# Altium PCB RPlan_LB2.PcbDoc
Units mm, origin at the board's own origin, x right, y up, seen from the top; angles counter-clockwise.
Board outline 38.2 x 43.28 mm, 2 copper layers (Top Layer, Bottom Layer); 36 components, 101 nets, 271 pads, 28 vias.
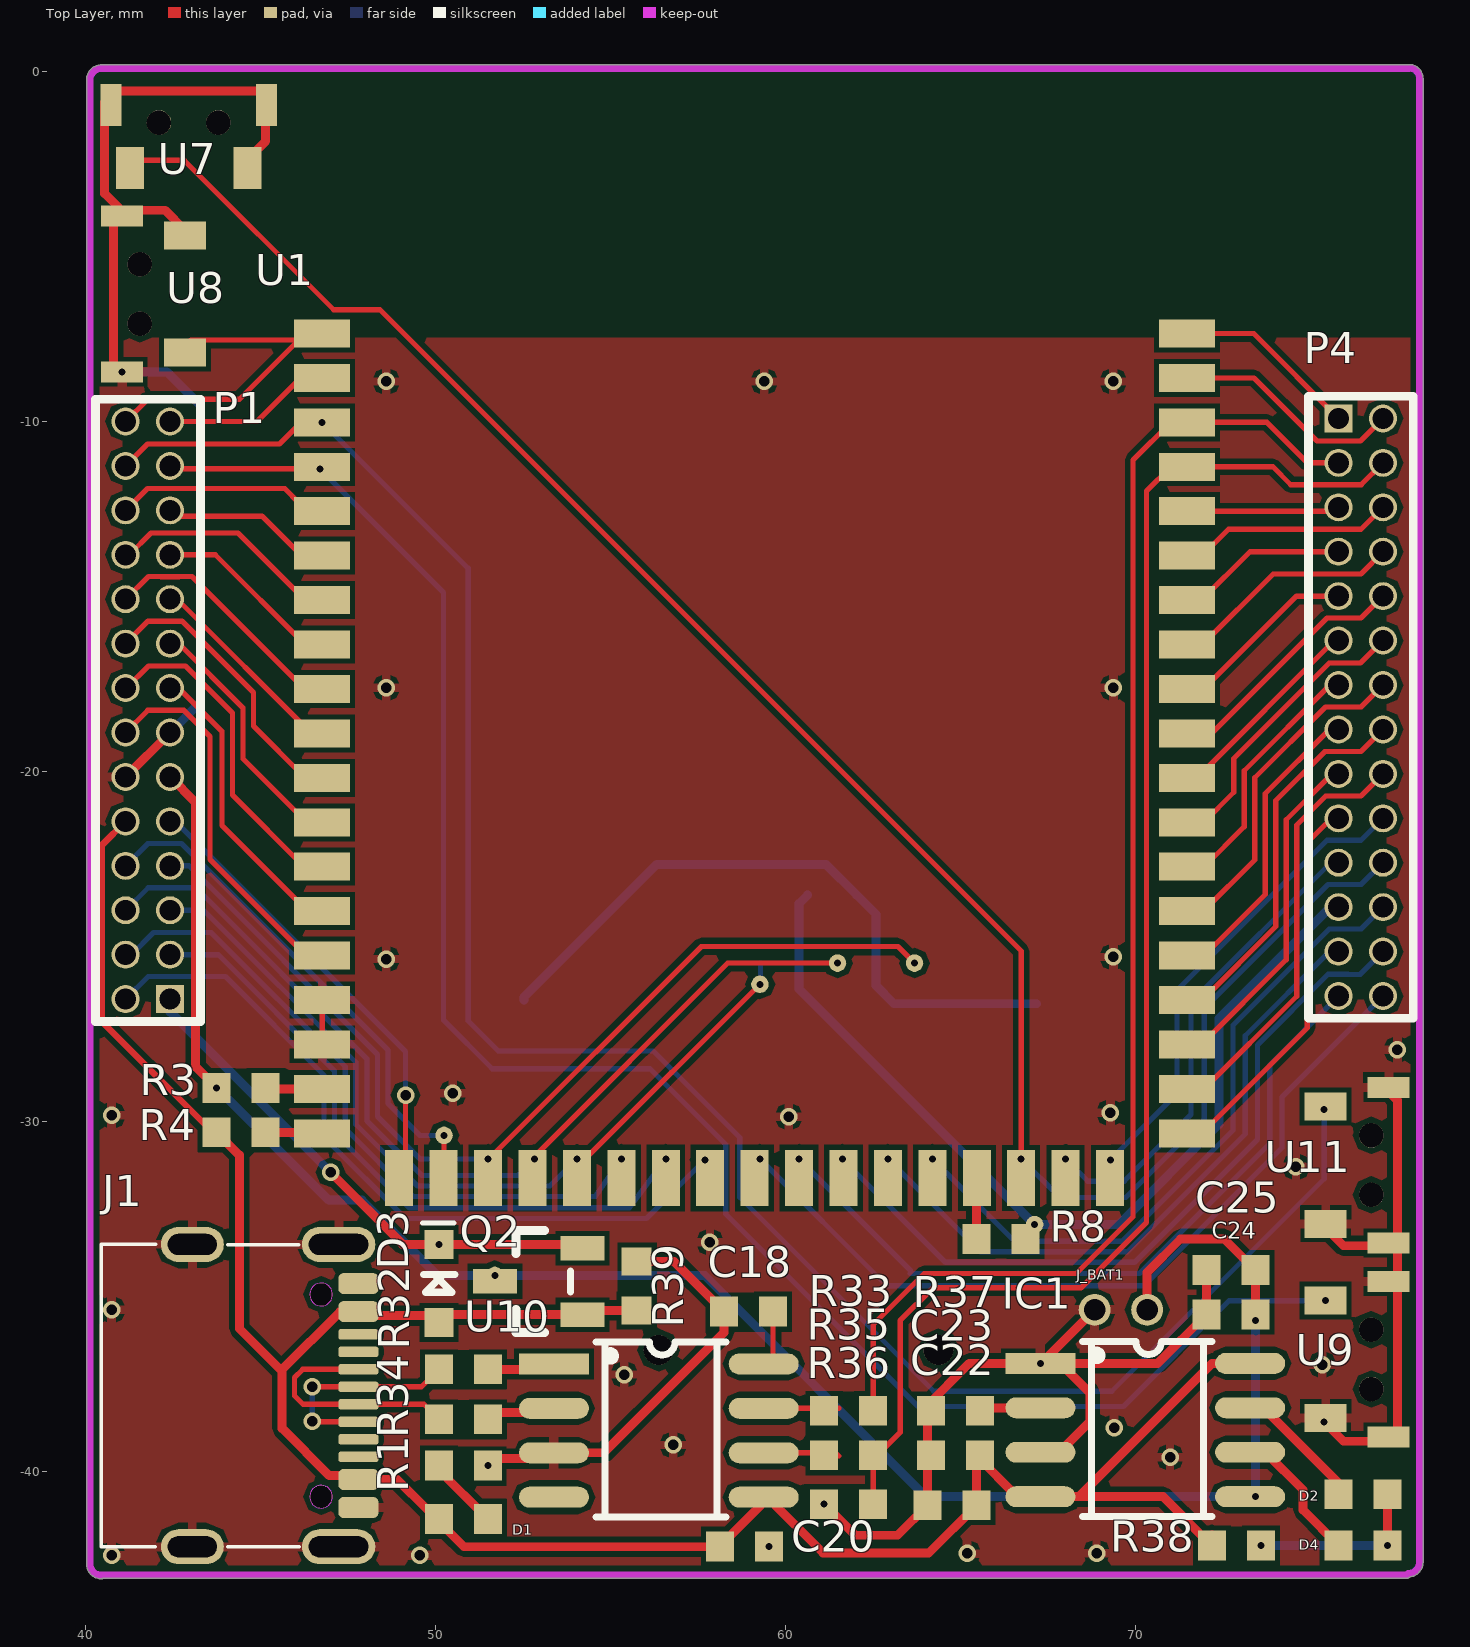
[diagram p0: Top Layer view]
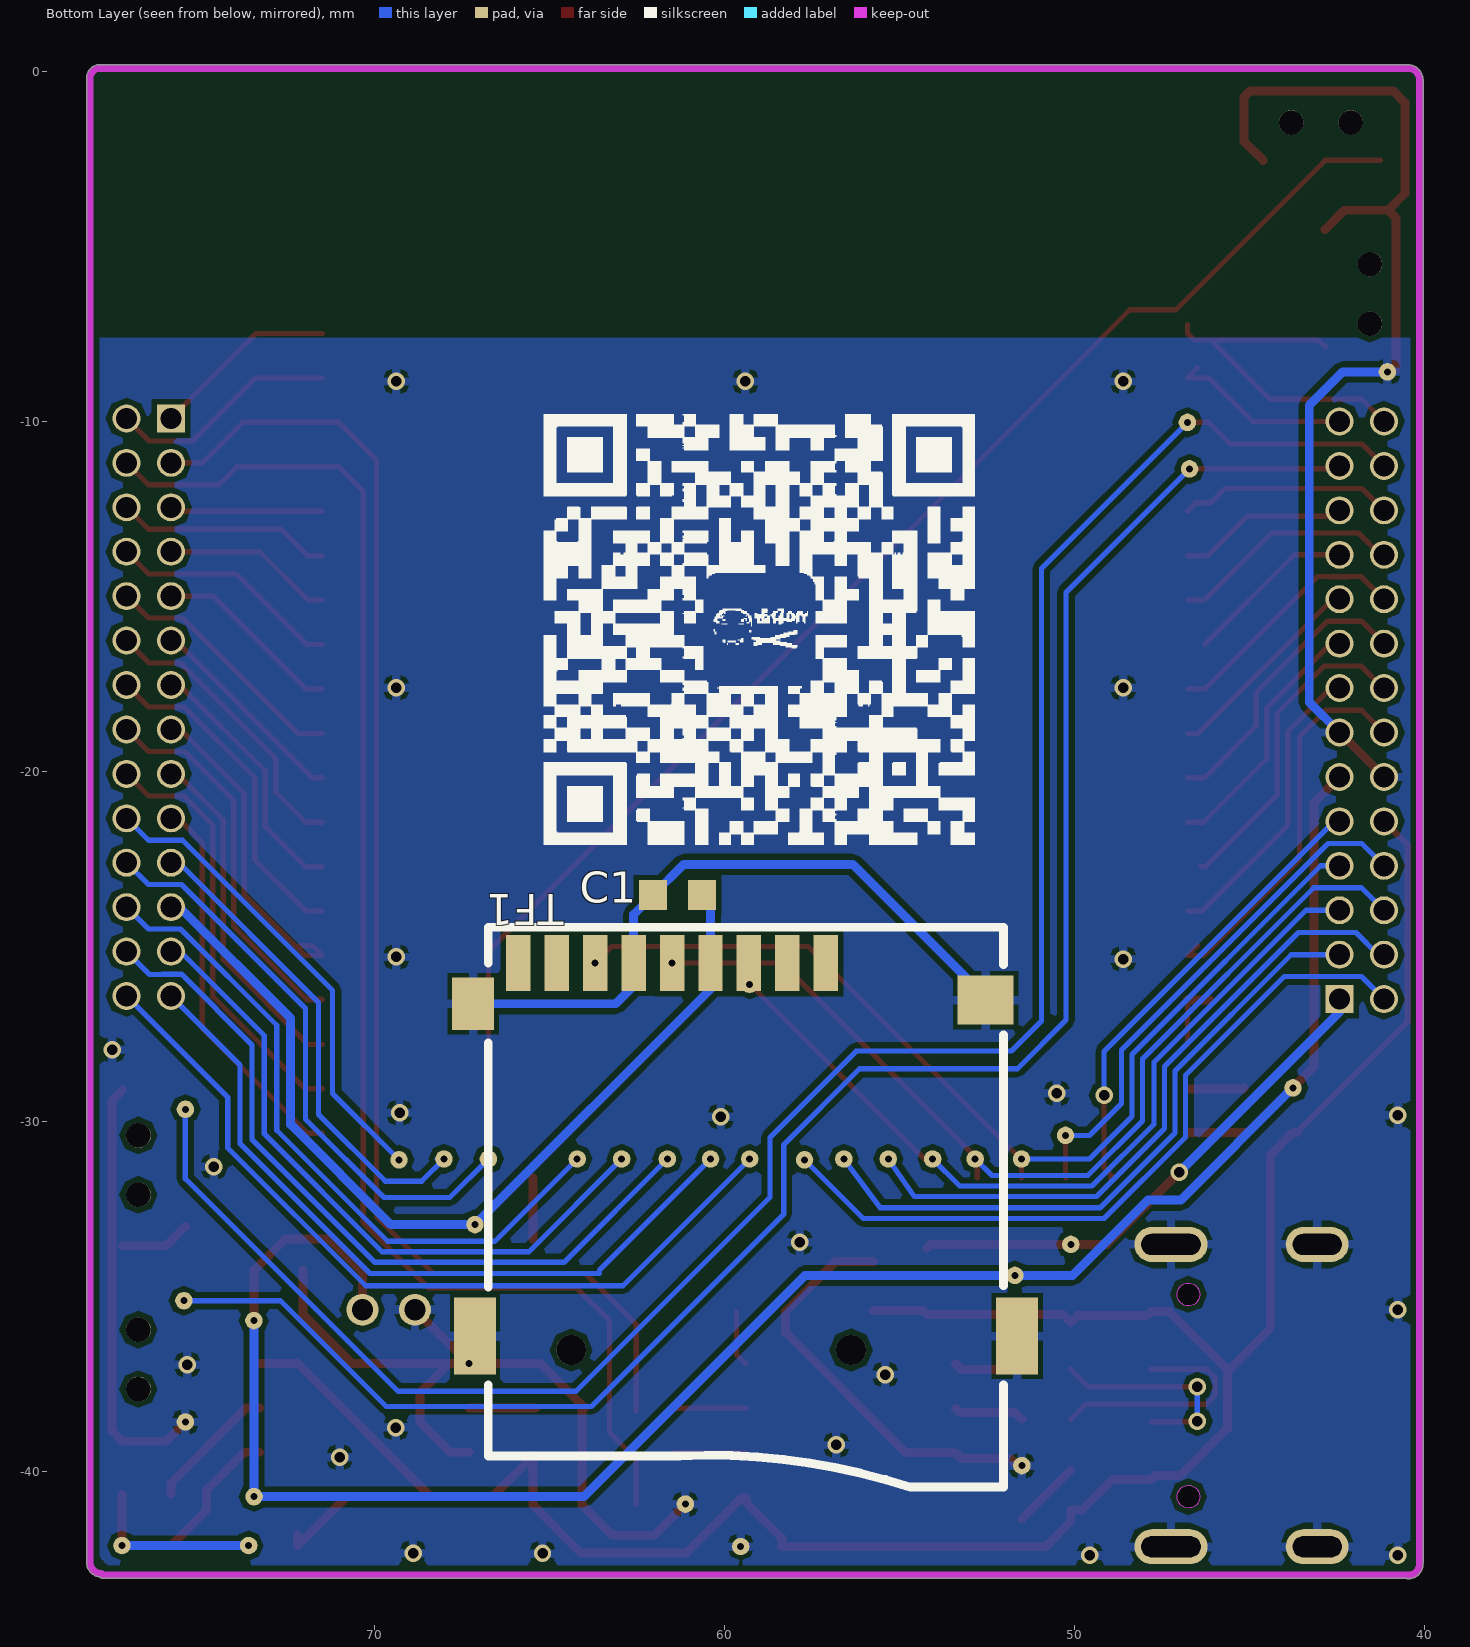
[diagram p1: Bottom Layer view, seen from below]

## Layer stack, top to bottom
Top Solder: solder mask 0.0102, Solder Resist, Dk 3.5
Top Layer: signal copper 0.0356
Dielectric 1: dielectric 0.32, FR-4, Dk 4.8
Bottom Layer: signal copper 0.0356
Bottom Solder: solder mask 0.0102, Solder Resist, Dk 3.5

## Board outline
40.032,-42.65 cw(c40.132,-42.65) 40.035,-42.625 cw(c40.132,-42.6) 40.032,-42.6 40.032,-0.223 cw(c40.132,-0.223) 40.033,-0.207 cw(c40.456,-0.223) 40.456,0.2 77.802,0.2 cw(c77.841,0.108) 77.841,0.209 cw(c77.841,-0.183) 78.232,-0.183 78.232,-42.599 78.232,-42.6 ccw(c78.132,-42.6) 78.232,-42.599 78.232,-42.6 cw(c77.809,-42.6) 77.852,-43.021 cw(c77.773,-42.959) 77.773,-43.059 40.505,-43.059 cw(c40.455,-42.973) 40.455,-43.073 cw(c40.455,-42.65)

## Design rules (kind name [scope] priority, off if disabled: settings)
Clearance [All] p1: gap=0.15 ignorepadtopadclearanceinfootprint=FALSE
PolygonConnect [All] p1: connectstyle=Relief reliefconductorwidth=0.254 reliefentries=4 polygonreliefangle="90 Angle" airgapwidth=0.127
RoutingVias [All] p1: holewidth=0.711 width=1.27 viastyle="Through Hole" minholewidth=0.711 minwidth=1.27 maxholewidth=0.711 maxwidth=1.27
SolderMaskExpansion [All] p1: expansion=0.102
Width [All] p1: maxlimit=0.254 minlimit=0.1 preferedwidth=0.254
30 further rules are at their usual default settings.

## Components (designator, comment, footprint, x,y, rotation, side; value= is the part's Value field where it differs from the comment)
C1 "0.1uf" 0603C 61.341,-23.528 r0 bottom
C18 "104" 0603C 58.955,-35.436 r180 top
C20 "104" 0603C 58.834,-42.15 r0 top
C22 "105" 0603C 64.77,-40.967 r0 top
C23 "104" 0603C 64.865,-39.542 r180 top
C24 "104" 0603C 72.744,-35.519 r180 top
C25 "106" 0603C 72.744,-34.249 r0 top
D1 "LED0" 0603C 50.8,-41.361 r0 top
D2 "LED0" 0603C 76.52,-40.655 r180 top
D3 "1N5819" SOD-323 50.1,-34.63 r90 top
D4 "LED0" 0603C 76.52,-42.123 r180 top
IC1 "TP4056/TC4056" SOP8_150mil 70.293,-38.821 r0 top
J1 "USB_TypeC" USB_TypeC 43.056,-42.156 r270 top
J_BAT1 "Header 2" BAT 69.596,-34.884 r180 top
P1 "connect" CONNECT 43.211,-27.139 r180 top
P4 "connect" CONNECT 75.026,-9.271 r0 top
Q2 "PMOS" SOT-23-3 52.959,-34.574 r0 top
R1 "10K" 0603C 50.8,-39.837 r180 top
R3 "" 0603C 44.45,-29.042 r180 top value=0R
R4 "" 0603C 44.45,-30.312 r180 top value=0R
R8 "" 0603C 66.167,-33.36 r0 top value=0R
R32 "0R" 0603C 50.8,-37.086 r180 top
R33 "1.2K" 0603C 61.817,-38.272 r180 top
R34 "0R" 0603C 50.8,-38.511 r180 top
R35 "1.2K" 0603C 61.817,-39.542 r180 top
R36 "1.5K" 0603C 61.817,-40.939 r0 top
R37 "1.5K" 0603C 64.865,-38.272 r180 top
R38 "4.7K" 0603C 72.898,-42.123 r180 top
R39 "100K" 0603C 55.753,-34.699 r270 top
TF1 "" TF1 57.098,-25.475 r180 bottom
U1 "RW052" RW052 59.127,-15.959 r0 top
U7 "key" KEY 42.95,-1.45 r0 top
U8 "key" KEY 41.55,-6.35 r90 top
U9 "key" KEY 76.75,-36.8 r270 top
U10 "CH330N" SOP8_150mil 56.388,-38.836 r0 top
U11 "key" KEY 76.75,-31.25 r270 top

## Footprints (in the part's own frame and the unit in brackets; to place one, negate y for a bottom-side part, rotate by r counter-clockwise, add the part's x,y. Pads: shape width x height; smd on the part's side, far side on the other; paste and mask are expansions set on the pad)
0603C [mm] "http://www.samsungsem.com/cn/front/downloadcms.do?path=%2F%2Fcn%2F%2Fsupport%2F%2Flibrary%2F%2Fproduct-catalog%2F%2F__icsFiles%2F%2Fafieldfile%2F%2F2015%2F%2F01%2F%2F12&fileName=CHIP_RESISTOR_150112_12.pdf"
  rect 0.8x0.85 smd: 1(-0.7,0) 2(0.7,0)
  Top Layer pour cut-out: -1.245,0.584 -1.245,-0.559 1.245,-0.559 1.245,0.584
  body extent -0.85,-0.45 0.85,0.45, height 0.55
BAT [mil]
  round 36 hole 24: 1(29.53,19.68) 2(-29.53,19.68)
CONNECT [mm]
  rect 0.8x0.8 hole 0.6: 1(0.793,-0.635)
  round 0.8 hole 0.6: 2(2.063,-0.635) 3(0.793,-1.905) 4(2.063,-1.905) 5(0.793,-3.175) 6(2.063,-3.175) 7(0.793,-4.445) 8(2.063,-4.445) 9(0.793,-5.715) 10(2.063,-5.715) 11(0.793,-6.985) 12(2.063,-6.985) 13(0.793,-8.255) 14(2.063,-8.255) 15(0.793,-9.525) 16(2.063,-9.525) 17(0.793,-10.795) 18(2.063,-10.795) 19(0.793,-12.065) 20(2.063,-12.065) 21(0.793,-13.335) 22(2.063,-13.335) 23(0.793,-14.605) 24(2.063,-14.605) 25(0.793,-15.875) 26(2.063,-15.875) 27(0.793,-17.145) 28(2.063,-17.145)
  silkscreen extent -0.07,-17.78 2.93,0
KEY [mm]
  round 0.7 hole 0.7: 0(-0.85,0) 0(0.85,0)
  rect 0.8x1.2 smd: 1(1.675,-1.3) 2(-1.675,-1.3)
  rect 0.6x1.2 smd: 3(2.225,0.5) 4(-2.225,0.5)
RW052 [mm]
  rect 1.6x0.8 smd: 1(-12.36,8.48) 2(-12.36,7.21) 3(-12.36,5.94) 4(-12.36,4.67) 5(-12.36,3.4) 6(-12.36,2.13) 7(-12.36,0.86) 8(-12.36,-0.41) 9(-12.36,-1.68) 10(-12.36,-2.95) 11(-12.36,-4.22) 12(-12.36,-5.49) 13(-12.36,-6.76) 14(-12.36,-8.03) 15(-12.36,-9.3) 16(-12.36,-10.57) 17(-12.36,-11.84) 18(-12.36,-13.11) 19(-12.36,-14.38) 37(12.36,-14.38) 38(12.36,-13.11) 39(12.36,-11.84) 40(12.36,-10.57) 41(12.36,-9.3) 42(12.36,-8.03) 43(12.36,-6.76) 44(12.36,-5.49) 45(12.36,-4.22) 46(12.36,-2.95) 47(12.36,-1.68) 48(12.36,-0.41) 49(12.36,0.86) 50(12.36,2.13) 51(12.36,3.4) 52(12.36,4.67) 53(12.36,5.94) 54(12.36,7.21) 55(12.36,8.48)
  rect 0.8x1.6 smd: 20(-10.16,-15.66) 21(-8.89,-15.66) 22(-7.62,-15.66) 23(-6.35,-15.66) 24(-5.08,-15.66) 25(-3.81,-15.66) 26(-2.54,-15.66) 27(-1.27,-15.66) 28(0,-15.66) 29(1.27,-15.66) 30(2.54,-15.66) 31(3.81,-15.66) 32(5.08,-15.66) 33(6.35,-15.66) 34(7.62,-15.66) 35(8.89,-15.66) 36(10.16,-15.66)
SOD-323 [mm]
  rect 0.83x0.83 smd: 1(-1.115,0) 2(1.115,0)
  silkscreen extent -0.25,-0.46 1.73,0.46
SOP8_150mil [mm]
  rect 2x0.6 smd: 1(-2.997,1.905)
  rrect100% 2x0.6 smd: 2(-2.997,0.635) 3(-2.997,-0.635) 4(-2.997,-1.905) 5(2.997,-1.905) 6(2.997,-0.635) 7(2.997,0.635) 8(2.997,1.905)
  silkscreen extent -1.79,-2.47 1.91,2.53, body extent -3.05,-2.5 2.99,2.52, height 1.6
SOT-23-3 [mm]
  rect 1.25x0.7 smd: 1(1.25,-0.95) 2(1.25,0.95) 3(-1.25,0)
  silkscreen extent -0.65,-1.46 0.9,1.46, body extent -1.5,-1.5 1.5,1.5, height 1.3
TF1 [mm]
  rect 0.7x1.6 smd: 1(0,0) 2(-1.1,0) 3(-2.2,0) 4(-3.3,0) 5(-4.4,0) 6(-5.5,0) 7(-6.6,0) 8(-7.7,0) 9(-8.8,0)
  rect 1.2x1.5 smd: 10(-10.083,-1.16)
  rect 1.2x2.2 smd: 10(-10.033,-10.66) 10(5.467,-10.66)
  rect 1.6x1.4 smd: 10(4.567,-1.06)
  round 0.85 hole 0.85 unplated: NC(-7.283,-11.06) NC(0.717,-11.06)
  silkscreen extent -9.65,-14.98 5.08,1.02
USB_TypeC [mm]
  round 0.65 hole 0.65 unplated: 0(-7.21,3.68) 0(-1.43,3.68)
  rrect50% 0.6x1.15 smd: A1(-7.52,4.745) A4(-6.72,4.745) B1(-1.12,4.745) B4(-1.92,4.745)
  rrect50% 0.3x1.15 smd: A5(-5.57,4.745) A6(-4.57,4.745) A7(-4.07,4.745) A8(-3.07,4.745) B5(-2.57,4.745) B6(-3.57,4.745) B7(-5.07,4.745) B8(-6.07,4.745)
  oval 1x2.1 hole 0.6 slot 1.7 at 90 deg: GND(-8.64,4.18) GND(0,4.18)
  oval 1x1.8 hole 0.6 slot 1.4 at 90 deg: GND(-8.64,0) GND(0,0)
  Keep-Out Layer circle w0.025: c-1.43,3.68 r0.325
  Keep-Out Layer circle w0.025: c-7.21,3.68 r0.325
  silkscreen extent -8.64,-2.6 0,3.05, body extent -9.27,-3.78 0.63,6.22, height 3.3

## Part data
C1 C18 C20 C23 C24 C25: library part Cap, "Capacitor", LatestRevisionDate=17-Jul-2002, LatestRevisionNote="Re-released for DXP Platform.", PackageReference=RAD-0.3, Published=8-Jun-2000, Publisher="Altium Limited"
C22: library part CAP, "Capacitor"
D1 D2 D4: "Typical INFRARED GaAs LED", LatestRevisionDate=08-Jul-2005, LatestRevisionNote="Mech Layer 1 removed.", PackageDescription="LED; 2 Leads", PackageReference=LED-0, Published=8-Jun-2000, Publisher="Altium Limited"
D3: library part Diode_SOD123, "Diode", Type=SOD123
IC1: library part 4056
J1: "USB"
J_BAT1: "Header, 2-Pin", LatestRevisionDate=17-Jul-2002, LatestRevisionNote="Re-released for DXP Platform.", Publisher="Altium Limited"
Q2: library part MOSFET_P_SOT23, "MOSFET"
R1 R32 R33 R34 R35 R36 R37 R38 R39: library part RES, "RES"
R3 R4 R8: library part Res2, "Resistor", LatestRevisionDate=17-Jul-2002, LatestRevisionNote="Re-released for DXP Platform.", PackageDescription="Axial Device, Thru-Hole; 2 Leads; 0.4 in Pin Spacing", PackageReference=AXIAL-0.4, Published=8-Jun-2000, Publisher="Altium Limited"
TF1: library part "HEADER 10"

## Free pads (board coordinates)
  round 0.5 hole 0.2: 39(50.25,-30.4) 40(51.507,-31.074) 41(52.832,-31.074) 42(54.048,-31.074) 43(55.317,-31.074) 44(56.587,-31.074) 45(57.71,-31.097) 46(59.277,-31.074) 47(60.397,-31.074) 48(61.633,-31.074) 49(62.937,-31.074) 50(64.207,-31.074) 52(66.747,-31.074) 53(68.017,-31.074) 54(67.131,-32.95) 55(73.598,-42.123) 56(77.22,-42.123) 80(63.698,-25.475) 81(61.498,-25.475) 82(59.277,-26.08) 83(75.408,-29.653) 84(75.45,-35.125) 85(46.767,-10.019) 86(46.704,-11.348) 87(69.3,-31.097) 90(50.1,-33.515) 92(73.45,-35.694) 93(73.444,-40.726) 94(51.7,-34.4) 95(43.75,-29.042) 111(59.534,-42.15) 112(61.117,-40.939) 113(51.5,-39.837) 114(75.408,-38.591) 115(41.05,-8.575) 116(67.296,-36.916)

## Via types
v1: diameter 0.5, hole 0.3, Top Layer to Bottom Layer, 28 vias

## Nets (pads, with @x,y where several pads share a name; then routed paths per layer and width w, separated by ;. In a path a pad name is that pad's centre, name@x,y a point inside that pad or via, vN(x,y) a via of type N, cw(c..) or ccw(c..) an arc to the next point about the centre after c; other vN are vias at no path point)
AGND: P4.14 U1.42 | length 9.7
  Top Layer w0.15: U1.42 71.961,-23.989 73.424,-22.526 73.424,-20.177 75.449,-18.151 76.464,-18.151 P4.14
AUDLN: P4.10 U1.46 | length 7.2
  Top Layer w0.15: U1.46 72.191,-18.909 75.487,-15.613 76.462,-15.613 P4.10
AUDLP: P4.9 U1.47 | length 5.4
  Top Layer w0.15: U1.47 71.961,-17.639 74.614,-14.986 P4.9
AUDRN: P4.12 U1.44 | length 8.3
  Top Layer w0.15: U1.44 71.967,-21.449 72.824,-20.592 72.824,-19.626 75.55,-16.9 76.445,-16.9 P4.12
AUDRP: P4.13 U1.43 | length 7.4
  Top Layer w0.15: U1.43 71.979,-22.719 73.124,-21.575 73.124,-19.977 75.574,-17.526 P4.13
CAM_PWND: 
CAM_RST: 
CEN: P4.22 pad.52 U1.34 U7.2 | length 57.4
  Top Layer w0.15: U7.2@41.251,-2.529 42.825,-2.529 47.096,-6.8 48.415,-6.8 66.747,-25.132 pad.52
  Bottom Layer w0.15: pad.52 67.851,-32.178 69.734,-32.178 71.976,-29.936 71.976,-26.774 75.519,-23.231 76.464,-23.231 P4.22
GND: C1.2 C18.2 C20.2 C22.1 C23.2 C24.2 C25.1 IC1.1 IC1.3 J1.A1 J1.B1 J1.GND J_BAT1.1 P1.12 P1.13 pad.111 pad.112 pad.113 pad.114 pad.115 pad.116 R1.1 R36.1 R37.2 R39.1 TF1.6 TF1.10 U1.16 U1.17 U7.1 U7.3 U7.4 U8.1 U8.3 U8.4 U9.1 U9.3 U9.4 U10.3 U11.1 U11.3 U11.4 | length 101.5
  Top Layer w0.15: U1.17 U1.16
  Top Layer w0.254: pad.115 40.8,-8.518 40.8,-4.186 U8.3@41.029,-3.957 ; P1.12 P1.13 ; U8.1@42.829,-4.507 42.279,-3.957 U8.3@41.029,-3.957 ; U7.1@44.601,-2.529 45.151,-1.979 45.151,-0.729 44.965,-0.543 40.887,-0.543 40.55,-0.88 40.55,-3.478 U8.3@41.029,-3.957 ; U1.16@46.128,-26.529 U1.16 ; pad.113@51.5,-39.964 51.825,-39.639 53.223,-39.639 U10.3 54.815,-39.471 58.255,-36.031 C18.2 56.818,-33.999 R39.1 ; pad.112 62.006,-41.828 63.211,-41.828 64.07,-40.969 C22.1 64.07,-38.251 64.005,-38.186 64.005,-38.176 65.265,-36.916 pad.116 pad.116@67.314,-36.916 ; IC1.3 67.835,-39.456 68.707,-38.584 68.707,-37.759 IC1.1@67.864,-36.916 ; J_BAT1.1 pad.116@67.314,-36.916 ; C25.1 C24.2 70.647,-36.916 IC1.1@67.864,-36.916 ; pad.114 75.958,-39.141 77.208,-39.141 77.5,-38.849 77.5,-29.395 U11.4@77.208,-29.103 ; U11.1@75.408,-33.003 75.958,-33.553 U11.3@77.208,-33.553 ; pad.116@67.314,-36.916 IC1.1@67.864,-36.916
  Bottom Layer w0.254: pad.115 42.325,-8.575 43.283,-9.533 43.283,-18.019 P1.13 ; TF1.10@52.531,-26.535 52.531,-26.453 56.333,-22.651 61.164,-22.651 C1.2 62.598,-24.085 TF1.6 62.598,-26.122 63.111,-26.635 TF1.10@67.181,-26.635
  other v1: 40.75,-42.4 49.555,-42.4 65.2,-42.35 68.9,-42.336 71,-39.6 56.8,-39.247 69.4,-38.75 55.4,-37.234 75.35,-36.95 40.75,-35.384 57.85,-33.45 74.6,-31.3 60.1,-29.862 40.75,-29.828 69.287,-29.75 50.5,-29.2 77.5,-27.95 48.6,-25.359 69.378,-25.3 48.6,-17.6 69.378,-17.6 48.6,-8.85 59.4,-8.85 69.378,-8.85
IN_N: 
IN_P: 
LINEL: P4.5 U1.51 | length 4.4
  Top Layer w0.15: U1.51 75.706,-12.559 P4.5
MCLK: 
MIC_N: 
MIC_P: 
MICBIAS: P4.6 U1.50 | length 6.2
  Top Layer w0.15: U1.50 71.921,-13.829 72.677,-13.073 76.462,-13.073 P4.6
MICLN: P4.8 U1.48 | length 6.7
  Top Layer w0.15: U1.48 71.931,-16.369 73.95,-14.35 76.455,-14.35 P4.8
MICLP: P4.7 U1.49 | length 4.9
  Top Layer w0.15: U1.49 71.901,-15.099 73.284,-13.716 P4.7
MUTE: 
NetC2_1: 
NetC7_1: 
NetC8_1: 
NetC9_1: 
NetC14_2: 
NetC15_2: 
NetC18_1: C18.1 U10.8 | length 1.6
  Top Layer w0.15: U10.8 59.655,-36.661 C18.1
NetD1_2: D1.2 R1.2 | length 2
  Top Layer w0.254: R1.2@50.1,-39.964 50.103,-39.964 D1.2
NetD2_1: D2.1 D4.1 pad.55 pad.56 R38.1 | length 5.1
  Top Layer w0.254: pad.56 D2.1
  Bottom Layer w0.254: pad.55 pad.56
NetD2_2: D2.2 IC1.7 | length 3.7
  Top Layer w0.254: IC1.7 73.665,-38.186 75.82,-40.341 D2.2
NetD4_2: D4.2 IC1.6 | length 4
  Top Layer w0.254: IC1.6 73.724,-39.456 74.803,-40.535 74.803,-41.106 D4.2
NetIC1_2: IC1.2 R37.1 | length 1.9
  Top Layer w0.254: R37.1@65.405,-38.186 IC1.2
NetQ1_1: 
NetQ1_3: 
NetR3_1: R3.1 U1.18 | length 1.6
  Top Layer w0.254: R3.1 45.177,-29.069 U1.18
NetR4_1: R4.1 U1.19 | length 1.6
  Top Layer w0.254: R4.1 46.74,-30.312 U1.19
NetR15_1: 
NetR16_1: 
NetR17_2: 
NetR18_2: 
NetR24_2: 
NetR26_2: 
NetR28_2: 
NetR32_1: R32.1 U10.1 | length 2
  Top Layer w0.254: R32.1 53.236,-37.086 U10.1
NetR33_2: R33.2 U10.7 | length 2.1
  Top Layer w0.15: U10.7 61.53,-38.201
NetR34_1: R34.1 U10.2 | length 2
  Top Layer w0.254: R34.1 51.689,-38.322 53.27,-38.322 U10.2
NetR35_2: R35.2 U10.6 | length 2.2
  Top Layer w0.15: U10.6 61.437,-39.471 61.53,-39.564
P0: P4.1 U1.55 | length 5.3
  Top Layer w0.15: U1.55 73.392,-7.479 P4.1
P1: P4.2 U1.54 | length 6.6
  Top Layer w0.15: U1.54 73.399,-8.749 75.2,-10.55 76.445,-10.55 P4.2
P2: P4.17 U1.39 | length 9.9
  Top Layer w0.15: U1.39 71.901,-27.799 74.323,-25.377 74.323,-21.377 75.634,-20.066 P4.17
P3: P4.19 U1.37 | length 11.2
  Top Layer w0.15: U1.37 71.911,-30.339 74.923,-27.327 74.923,-22.026 75.614,-21.336 P4.19
P4: P4.18 U1.38 | length 12.2
  Top Layer w0.15: U1.38 71.976,-29.069 74.623,-26.421 74.623,-21.526 75.45,-20.7 76.455,-20.7 P4.18
P5: P4.20 pad.87 U1.36 | length 13.6
  Bottom Layer w0.15: pad.87 71.2,-29.197 71.2,-26.25 75.487,-21.963 76.462,-21.963 P4.20
P6: P4.16 U1.40 | length 11.3
  Top Layer w0.15: U1.40@71.882,-26.502 71.514,-26.502 U1.40 71.924,-26.529 74.023,-24.429 74.023,-20.827 75.427,-19.423 76.462,-19.423 P4.16
P7: P4.15 U1.41 | length 9.5
  Top Layer w0.15: U1.41@72.136,-24.978 71.768,-24.978 U1.41 71.98,-25.259 73.724,-23.515 73.724,-20.627 75.554,-18.796 P4.15
P10: P4.4 R35.1 R36.2 U1.52 | length 42.3
  Top Layer w0.15: R36.2 R35.1 62.636,-39.542 63.287,-38.891 63.287,-35.694 64.224,-34.757 68.454,-34.757 70.326,-32.885 70.326,-11.983 71.02,-11.289 U1.52 73.939,-11.289 74.451,-11.801 76.464,-11.801 P4.4
P11: P4.3 R33.1 U1.53 | length 39.6
  Top Layer w0.15: R33.1 62.517,-35.808 63.976,-34.349 68.321,-34.349 69.945,-32.725 69.945,-11.094 71.02,-10.019 U1.53 73.769,-10.019 74.926,-11.176 P4.3
P12: P1.26 pad.83 pad.85 U1.3 U11.2 | length 59.3
  Top Layer w0.15: P1.26 41.777,-10.635 45.542,-10.635 46.158,-10.019 pad.85
  Bottom Layer w0.15: pad.85 50.94,-14.192 50.94,-27.126 51.799,-27.985 56.229,-27.985 58.7,-30.456 58.7,-32.167 64.246,-37.713 69.334,-37.713 75.408,-31.639 pad.83
P13: P1.25 pad.84 pad.86 U1.4 U9.2 | length 53.7
  Top Layer w0.15: P1.25 42.502,-11.348 pad.86
  Bottom Layer w0.15: pad.86 50.237,-14.881 50.237,-27.103 51.627,-28.493 56.139,-28.493 58.302,-30.656 58.302,-32.649 63.798,-38.145 69.668,-38.145 72.688,-35.125 pad.84
P14: P1.6 pad.41 pad.81 TF1.5 U1.23 | length 28.2
  Top Layer w0.15: U1.23 52.777,-31.056 58.358,-25.475 pad.81
  Bottom Layer w0.15: P1.6 41.793,-23.319 43.157,-23.319 48.05,-28.212 48.05,-29.983 49.616,-31.549 52.357,-31.549 pad.41
P15: P1.4 pad.43 U1.25 | length 19.2
  Bottom Layer w0.15: P1.4 41.316,-25.234 41.95,-24.6 43.59,-24.6 47.424,-28.434 47.424,-30.206 49.367,-32.149 54.563,-32.149 54.569,-32.143 pad.43
P16: P1.5 pad.42 pad.82 TF1.3 U1.24 | length 23.9
  Top Layer w0.15: pad.42 54.283,-31.074 pad.82
  Bottom Layer w0.15: P1.5 43.378,-23.964 47.724,-28.31 47.724,-30.081 49.492,-31.849 53.273,-31.849 pad.42 ; TF1.3@59.298,-25.824 TF1.3
P17: P1.7 pad.40 pad.80 TF1.7 U1.22 | length 29
  Top Layer w0.15: U1.22 51.507,-31.097 57.604,-25 63.223,-25 pad.80
  Bottom Layer w0.15: P1.7 42.956,-22.694 48.35,-28.088 48.35,-29.859 49.565,-31.074 pad.40
P18: P1.3 pad.44 U1.26 | length 18.9
  Bottom Layer w0.15: P1.3 43.799,-25.234 47.122,-28.556 47.122,-30.271 47.124,-30.274 47.124,-30.33 49.265,-32.471 55.543,-32.471 pad.44
P19: P1.8 pad.39 U1.21 | length 14.9
  Top Layer w0.15: U1.21 50.25,-31.606 pad.39
  Bottom Layer w0.15: P1.8 41.783,-22.059 42.746,-22.059 48.65,-27.963 48.65,-29.487 49.563,-30.4 pad.39
P20: P4.24 pad.50 U1.32 | length 19.6
  Bottom Layer w0.15: pad.50 66.558,-33.425 69.625,-33.425 72.798,-30.252 72.798,-27.252 75.55,-24.5 75.559,-24.5 75.56,-24.501 76.464,-24.501 P4.24
P21: P4.25 pad.49 U1.31 | length 19.2
  Bottom Layer w0.15: pad.49 65.588,-33.725 69.785,-33.725 73.15,-30.36 73.15,-27.55 75.554,-25.146 P4.25
P22: P4.26 pad.48 U1.30 | length 21.9
  Bottom Layer w0.15: pad.48 64.587,-34.028 69.984,-34.028 73.5,-30.512 73.5,-27.814 75.523,-25.791 76.078,-25.791 76.087,-25.8 76.435,-25.8 P4.26
P23: P4.27 pad.47 U1.29 | length 21.3
  Bottom Layer w0.15: pad.47 63.572,-34.249 ; 63.572,-34.349 70.131,-34.349 73.85,-30.63 73.85,-28.385 P4.27
P24: P1.2 pad.45 U1.27 | length 21.4
  Bottom Layer w0.15: P1.2 41.793,-25.859 44,-25.859 46.822,-28.68 46.822,-30.452 49.146,-32.776 56.032,-32.776 pad.45
P25: P1.27 U1.2 | length 5.3
  Top Layer w0.15: P1.27 44.9,-9.994 46.145,-8.749 U1.2 U1.2@46.486,-8.468
P26: P4.28 pad.46 U1.28 | length 23.6
  Bottom Layer w0.15: pad.46 62.902,-34.699 70.254,-34.699 74.2,-30.753 74.2,-29.305 P4.28
P27: P1.21 U1.8 | length 4.9
  Top Layer w0.15: P1.21 43.711,-13.804 U1.8@46.276,-16.369
P28: P1.28 U1.1 U8.2 | length 10.3
  Top Layer w0.15: P1.28 41.783,-9.359 44.402,-9.359 U1.1@46.096,-7.665 ; U8.2@42.829,-7.857 43.021,-7.665 U1.1@46.096,-7.665 ; U1.1@46.767,-7.229 U1.1 46.581,-7.665 U1.1@46.096,-7.665
P29: P1.22 U1.7 | length 6.7
  Top Layer w0.15: P1.22 41.253,-13.804 41.878,-13.179 44.356,-13.179 46.276,-15.099 U1.7
P30: P1.20 U1.9 | length 7.2
  Top Layer w0.15: P1.20 41.8,-14.422 42.152,-14.422 42.159,-14.429 42.677,-14.429 42.684,-14.422 43.049,-14.422 46.266,-17.639 U1.9
P31: P1.19 U1.10 | length 5.9
  Top Layer w0.15: P1.19 42.624,-15.074 46.459,-18.909 U1.10
P32: P1.23 U1.6 | length 4.9
  Top Layer w0.15: P1.23 42.584,-12.7 45.046,-12.7 46.175,-13.829 U1.6
P33: P1.24 U1.5 | length 6.1
  Top Layer w0.15: P1.24 41.773,-11.909 45.696,-11.909 46.106,-12.319 46.527,-12.319 U1.5
P34: P1.18 U1.11 | length 8.3
  Top Layer w0.15: P1.18 41.792,-15.7 42.759,-15.7 44.8,-17.741 44.8,-18.696 46.283,-20.179 U1.11
P35: P1.17 U1.12 | length 7.3
  Top Layer w0.15: P1.17 42.666,-16.344 44.5,-18.178 44.5,-19.633 46.316,-21.449 U1.12
P36: P1.16 U1.13 | length 9.2
  Top Layer w0.15: P1.16 41.167,-17.614 41.8,-16.981 42.857,-16.981 44.2,-18.324 44.2,-20.67 46.249,-22.719 U1.13@46.382,-22.719
P37: P1.15 U1.14 | length 8.6
  Top Layer w0.15: P1.15 42.664,-17.614 43.9,-18.85 43.9,-21.543 46.346,-23.989 U1.14
P38: P1.14 U1.15 | length 11.2
  Top Layer w0.15: P1.14 41.782,-18.25 42.814,-18.25 43.561,-18.997 43.561,-22.511 46.309,-25.259 U1.15 U1.15@46.486,-24.978
P39: P1.9 U1.20 | length 13.2
  Top Layer w0.15: U1.20 48.914,-31.566 49.15,-31.329 v1(49.15,-29.25)
  Bottom Layer w0.15: P1.9 42.574,-21.424 49.15,-28 v1(49.15,-29.25)
PCLK: 
SCL: 
SDA: 
SPK_VDD: 
USBN: J1.A7 J1.B7 R34.2 | length 6.8
  Top Layer w0.15: J1.B7 46.212,-37.086 45.974,-37.324 45.974,-37.84 46.22,-38.086 J1.A7 49.675,-38.086 R34.2
USBP: J1.A6 J1.B6 R32.2 | length 6.1
  Top Layer w0.15: v1(46.482,-38.563) 46.505,-38.586 J1.B6 ; v1(46.482,-37.586) J1.A6 49.6,-37.586 R32.2
  Bottom Layer w0.15: v1(46.482,-38.563) v1(46.482,-37.586)
V1.8: 
V2.8: 
VBAT: C24.1 C25.2 IC1.5 J_BAT1.2 P1.11 pad.92 pad.93 pad.94 pad.95 Q2.3 R3.2 | length 55.2
  Top Layer w0.254: P1.11 43.15,-20.886 43.15,-28.442 pad.95 ; J_BAT1.2 70.346,-34.314 71.3,-33.36 72.555,-33.36 C25.2 C24.1
  Bottom Layer w0.254: pad.95 46.958,-32.25 47.9,-32.25 50.05,-34.4 pad.94 57.694,-34.4 64.02,-40.726 pad.93 73.444,-35.7 pad.92
VCOM: P4.11 U1.45 | length 6
  Top Layer w0.15: U1.45 71.771,-20.179 75.694,-16.256 P4.11
VDD: C1.1 P4.23 pad.54 R8.2 TF1.4 | length 26.5
  Bottom Layer w0.254: C1.1 60.398,-23.771 TF1.4 60.398,-26.217 pad.54 69.534,-32.95 72.4,-30.084 72.4,-27.052 75.576,-23.876 P4.23
VDDRAM: R8.1 U1.33 | length 1.7
  Top Layer w0.254: R8.1 65.467,-31.629 U1.33
VIO: P4.21 pad.53 U1.35 | length 13.9
  Bottom Layer w0.15: pad.53@68.212,-31.074 pad.53 68.65,-31.707 69.693,-31.707 71.6,-29.8 71.6,-26.6 75.594,-22.606 P4.21
VO_N: 
VO_P: 
VPWR: D3.2 P1.1 pad.90 Q2.2 | length 15
  Top Layer w0.254: v1(47.005,-31.455) 49.065,-33.515 pad.90 54.1,-33.515 Q2.2
  Bottom Layer w0.254: P1.1 42.418,-26.868 v1(47.005,-31.455)
VUSB: C20.1 C22.2 C23.1 D1.1 D3.1 IC1.4 IC1.8 J1.A4 J1.B4 P1.10 Q2.1 R4.2 R38.2 R39.2 U10.5 | length 70.3
  Top Layer w0.18: P1.10 40.472,-22.1 40.472,-27.15 R4.2@43.634,-30.312
  Top Layer w0.254: R4.2@43.634,-30.312 R4.2 44.4,-30.962 44.4,-35.918 45.562,-37.08 ; 45.599,-37.117 47.28,-35.436 J1.A4 47.914,-35.549 49.904,-35.549 D3.1 50.321,-35.524 Q2.1 54.334,-35.399 R39.2 ; 45.622,-37.178 45.622,-38.772 46.974,-40.124 47.689,-40.124 J1.B4 48.914,-40.236 49.785,-41.107 50.1,-41.107 D1.1 50.1,-41.436 50.82,-42.156 58.355,-42.156 58.355,-41.911 59.385,-40.88 U10.5 59.491,-40.741 61.086,-42.336 64.101,-42.336 C22.2 65.47,-39.564 66.632,-40.726 IC1.4 68.393,-40.726 ; R38.2@72.198,-41.818 R38.2 70.801,-40.726 68.393,-40.726 ; IC1.8 72.203,-36.916 68.393,-40.726
pads on no net: J1.0 J1.A5 J1.A8 J1.B5 J1.B8 TF1.1 TF1.2 TF1.8 TF1.9 TF1.NC U7.0 U8.0 U9.0 U10.4 U11.0

## Polygon pours and split planes (outlines as drawn)
GND on Bottom Layer "Bottom Layer-GND" (solid, pour order 58): 40.132,-43 40.15,-42.982 40.15,-7.6 78.132,-7.6 78.132,-42.959
GND on Top Layer "Top Layer-GND 1" (solid, pour order 60): 40.15,-7.6 78.132,-7.6 78.132,-42.959 40.173,-42.959 40.132,-43
GND on Top Layer "Top Layer-GND" (solid, pour order 8): 43.5,3.5

## Keep-outs
Keep-Out Layer:
  lines w0.2: 40.132,-42.65 ccw(c40.455,-42.65) 40.455,-42.973 ; 40.132,-42.6 40.132,-0.223 ; 40.133,-0.223 cw(c40.456,-0.223) 40.456,0.1 77.841,0.1 ; 40.455,-42.959 77.773,-42.959 77.809,-42.923 ccw(c77.809,-42.6) 78.132,-42.6 78.132,-0.183 ccw(c77.841,-0.183) 77.841,0.108

## Silkscreen, mask and mechanical layers (free items; w line width, h text height)
Bottom Overlay:
  drawing of 4510 lines, arcs and shapes, not listed

## Text inside footprints (layer, text, board x,y; h text height)
J_BAT1: Mechanical 1 "+" at 70.612,-34.249 h0.64 r180; Mechanical 1 "-" at 69.088,-34.249 h0.64 r180